# EAGLE board TestHeatBedController (EAGLE 6.1)
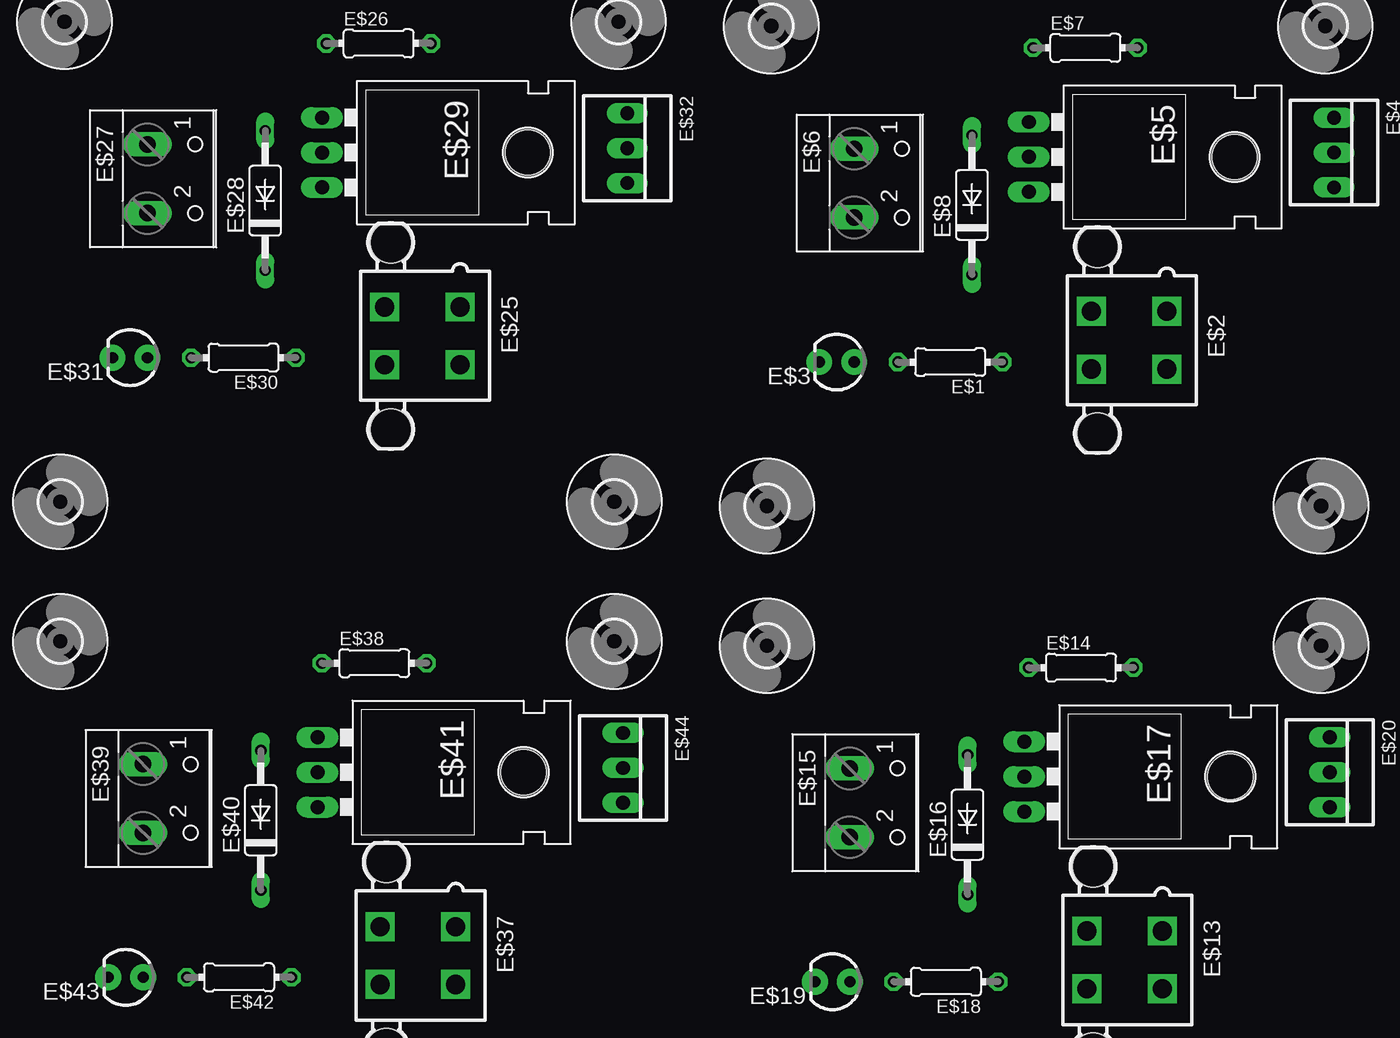
[diagram p0: board, top side]
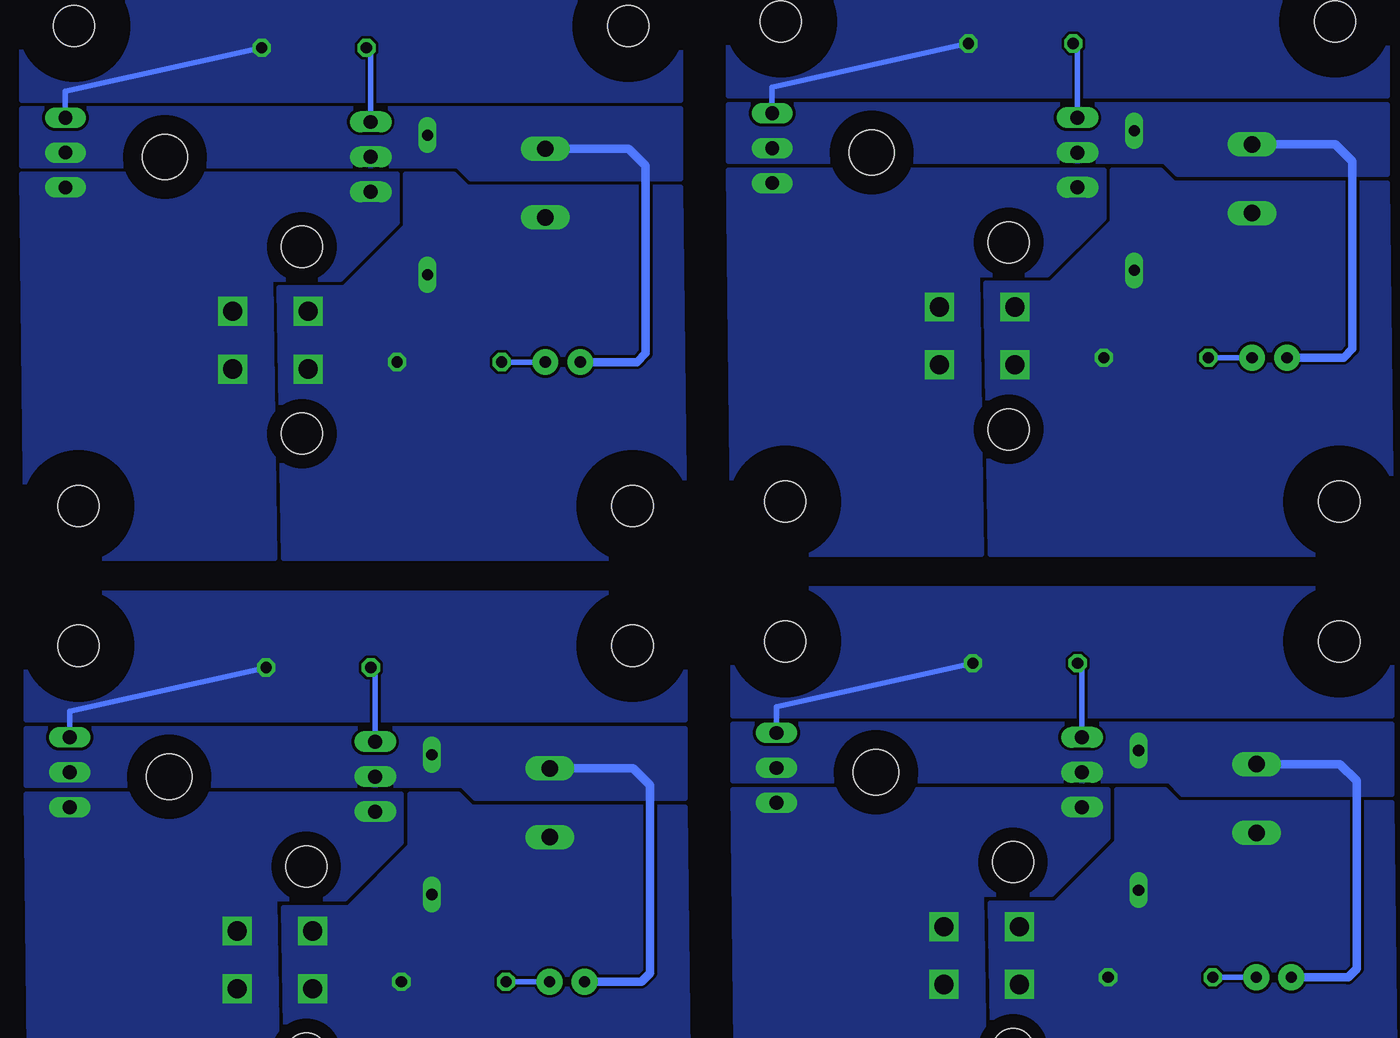
[diagram p1: board, bottom side, seen from below]

No outline drawn. Coordinates in mm, seen from the top.
Copper layers (1*16): Top 0.035mm / dielectric 1.5mm / Bottom 0.035mm
Design rules: minimum track width 10mil, minimum drill 24mil, track to track 8mil, track to pad 8mil, pad to pad 8mil, via to via 8mil, smd to smd 8mil, copper to edge 40mil, drill to drill 8mil, minimum pad ring 10mil, minimum via ring 8mil, stop-mask expansion 4mil, vias tented up to drill 0mil, thermal gap 0mil

## Footprints (pad centres in the part's own frame; a part is rotated, then mirrored left to right if it is on the bottom)
0204/7 = drill 0.813 octagon: 1 -3.81,0; 2 3.81,0
5566-4 = drill 1.4 square: 1 2.1,-2.75; 2 -2.1,-2.75; 3 2.1,2.75; 4 -2.1,2.75 | hole 3: 6.8,2.29; -6.8,2.29
LED3MM = drill 0.813 pad 1.88: A -1.27,0; K 1.27,0
22-23-2031 = drill 1 long: 1 -2.54,0; 2 0,0; 3 2.54,0
TO-220-ALT = drill 1.016 long: GND 0,-3.81; IN -2.54,-3.81; OUT 2.54,-3.81 | hole 3.302: 0,11.176
W237-102 = drill 1.194 long: 1 -2.5,-1.27; 2 2.5,-1.27
C2992 = drill 0.813 long: A 5.08,0; C -5.08,0
3,0 = hole 3: 0,0

## Placement (x,y rotation side)
E$1  [0204/7]  22.54,42.23 180 top
E$2  [5566-4]  35.56,43.81 90 top
E$3  [LED3MM]  14.29,42.23 180 top
E$4  [22-23-2031]  50.48,57.47 270 top
E$5  [TO-220-ALT]  32.07,57.15 270 top
E$6  [W237-102]  16.83,55.24 270 top
E$7  [0204/7]  32.38,65.09 0 top
E$8  [C2992]  24.13,53.66 90 top
E$9  [3,0]  49.53,31.75 0 top
E$10  [3,0]  9.21,31.75 0 top
E$11  [3,0]  49.85,66.67 0 top
E$12  [3,0]  9.53,66.67 0 top
E$13  [5566-4]  35.24,-1.27 90 top
E$14  [0204/7]  32.07,20 0 top
E$15  [W237-102]  16.51,10.16 270 top
E$16  [C2992]  23.81,8.57 90 top
E$17  [TO-220-ALT]  31.75,12.06 270 top
E$18  [0204/7]  22.23,-2.86 180 top
E$19  [LED3MM]  13.97,-2.86 180 top
E$20  [22-23-2031]  50.16,12.38 270 top
E$21  [3,0]  49.21,-13.34 0 top
E$22  [3,0]  8.89,-13.34 0 top
E$23  [3,0]  49.53,21.59 0 top
E$24  [3,0]  9.21,21.59 0 top
E$25  [5566-4]  -15.88,44.13 90 top
E$26  [0204/7]  -19.05,65.41 0 top
E$27  [W237-102]  -34.61,55.56 270 top
E$28  [C2992]  -27.3,53.98 90 top
E$29  [TO-220-ALT]  -19.37,57.47 270 top
E$30  [0204/7]  -28.89,42.55 180 top
E$31  [LED3MM]  -37.15,42.55 180 top
E$32  [22-23-2031]  -0.95,57.78 270 top
E$33  [3,0]  -1.91,32.07 0 top
E$34  [3,0]  -42.23,32.07 0 top
E$35  [3,0]  -1.59,66.99 0 top
E$36  [3,0]  -41.91,66.99 0 top
E$37  [5566-4]  -16.19,-0.95 90 top
E$38  [0204/7]  -19.37,20.32 0 top
E$39  [W237-102]  -34.92,10.48 270 top
E$40  [C2992]  -27.62,8.89 90 top
E$41  [TO-220-ALT]  -19.68,12.38 270 top
E$42  [0204/7]  -29.21,-2.54 180 top
E$43  [LED3MM]  -37.47,-2.54 180 top
E$44  [22-23-2031]  -1.27,12.7 270 top
E$45  [3,0]  -2.22,-13.02 0 top
E$46  [3,0]  -42.55,-13.02 0 top
E$47  [3,0]  -1.91,21.91 0 top
E$48  [3,0]  -42.23,21.91 0 top

## Library data of the parts
E$1 E$7 E$14 E$18 E$26 E$30 E$38 E$42 = resistor
E$2 E$4 E$13 E$20 E$25 E$32 E$37 E$44 = con-molex
E$3 E$19 E$31 E$43 = SparkFun-LED
E$5 E$17 E$29 E$41 = SparkFun-PowerIC
E$6 E$15 E$27 E$39 = con-wago-500
E$8 E$16 E$28 E$40 = diode
E$9-E$12 E$21-E$24 E$33-E$36 E$45-E$48 = holes

## Nets
12V: E$1.1 E$2.3 E$2.4 E$6.2 E$8.C
12V1: E$13.3 E$13.4 E$15.2 E$16.C E$18.1
12V2: E$25.3 E$25.4 E$27.2 E$28.C E$30.1
12V3: E$37.3 E$37.4 E$39.2 E$40.C E$42.1
GATE: E$5.IN E$7.1
GATE1: E$14.1 E$17.IN
GATE2: E$26.1 E$29.IN
GATE3: E$38.1 E$41.IN
GND: E$2.1 E$2.2 E$4.3 E$5.OUT
GND1: E$13.1 E$13.2 E$17.OUT E$20.3
GND2: E$25.1 E$25.2 E$29.OUT E$32.3
GND3: E$37.1 E$37.2 E$41.OUT E$44.3
S$1: E$18.2 E$19.A
S$2: E$1.2 E$3.A
S$3: E$30.2 E$31.A
S$4: E$42.2 E$43.A
SIG: E$4.1 E$7.2
SIG1: E$14.2 E$20.1
SIG2: E$26.2 E$32.1
SIG3: E$38.2 E$44.1
VMOS: E$3.K E$4.2 E$5.GND E$6.1 E$8.A
VMOS1: E$15.1 E$16.A E$17.GND E$19.K E$20.2
VMOS2: E$27.1 E$28.A E$29.GND E$31.K E$32.2
VMOS3: E$39.1 E$40.A E$41.GND E$43.K E$44.2

## Tracks (layer width: path | path; a pad name or v marks a point on that pad's centre or on a via)
12V
  pour Bottom: 25.72,55.88 25.72,52.07 30.16,47.62 34.92,47.62 34.61,27.94 5.4,27.94 5.71,54.93 21.27,54.93 22.23,55.88
12V1
  pour Bottom: 25.4,10.79 25.4,6.99 29.84,2.54 34.61,2.54 34.29,-17.14 5.08,-17.14 5.4,9.84 20.95,9.84 21.91,10.79
12V2
  pour Bottom: -25.72,56.2 -25.72,52.39 -21.27,47.94 -16.51,47.94 -16.83,28.26 -46.04,28.26 -45.72,55.24 -30.16,55.24 -29.21,56.2
12V3
  pour Bottom: -26.04,11.11 -26.04,7.3 -21.59,2.86 -16.83,2.86 -17.14,-16.83 -46.35,-16.83 -46.04,10.16 -30.48,10.16 -29.53,11.11
GATE
  Bottom 0.406: E$7.1 28.26,64.77 E$5.IN
GATE1
  Bottom 0.406: E$14.1 27.94,19.68 E$17.IN
GATE2
  Bottom 0.406: E$26.1 -23.18,65.09 E$29.IN
GATE3
  Bottom 0.406: E$38.1 -23.5,20 E$41.IN
GND
  pour Bottom: 26.35,55.88 53.66,55.88 53.34,27.94 35.24,27.94 35.56,48.26 30.48,48.26 26.35,52.39
GND1
  pour Bottom: 26.04,10.79 53.34,10.79 53.02,-17.14 34.92,-17.14 35.24,3.17 30.16,3.17 26.04,7.3
GND2
  pour Bottom: -25.08,56.2 2.22,56.2 1.91,28.26 -16.19,28.26 -15.88,48.58 -20.95,48.58 -25.08,52.7
GND3
  pour Bottom: -25.4,11.11 1.91,11.11 1.59,-16.83 -16.51,-16.83 -16.19,3.49 -21.27,3.49 -25.4,7.62
S$1
  Bottom 0.406: E$19.A E$18.2
S$2
  Bottom 0.406: E$3.A E$1.2
S$3
  Bottom 0.406: E$31.A E$30.2
S$4
  Bottom 0.406: E$43.A E$42.2
SIG
  Bottom 0.406: E$7.2 50.48,61.91 E$4.1
  pour Bottom: 5.71,61.28 53.66,61.28 53.66,70.48 5.71,70.48
SIG1
  Bottom 0.406: E$14.2 50.16,16.83 E$20.1
  pour Bottom: 5.4,16.19 53.34,16.19 53.34,25.4 5.4,25.4
SIG2
  Bottom 0.406: E$26.2 -0.95,62.23 E$32.1
  pour Bottom: -45.72,61.59 2.22,61.59 2.22,70.8 -45.72,70.8
SIG3
  Bottom 0.406: E$38.2 -1.27,17.14 E$44.1
  pour Bottom: -46.04,16.51 1.91,16.51 1.91,25.72 -46.04,25.72
VMOS
  Bottom 0.406: E$6.1 14.88,57.74
  Bottom 0.61: 14.88,57.74 9.48,57.74 8.26,56.52 8.26,42.86 8.89,42.23 E$3.K
  pour Bottom: 53.66,56.52 21.91,56.52 20.95,55.56 5.71,55.56 5.71,60.64 53.66,60.64
VMOS1
  Bottom 0.406: E$15.1 14.56,12.66
  Bottom 0.61: 14.56,12.66 9.17,12.66 7.94,11.43 7.94,-2.22 8.57,-2.86 E$19.K
  pour Bottom: 53.34,11.43 21.59,11.43 20.64,10.48 5.4,10.48 5.4,15.56 53.34,15.56
VMOS2
  Bottom 0.406: E$27.1 -36.55,58.06
  Bottom 0.61: -36.55,58.06 -41.95,58.06 -43.18,56.83 -43.18,43.18 -42.55,42.55 E$31.K
  pour Bottom: 2.22,56.83 -29.53,56.83 -30.48,55.88 -45.72,55.88 -45.72,60.96 2.22,60.96
VMOS3
  Bottom 0.406: E$39.1 -36.87,12.98
  Bottom 0.61: -36.87,12.98 -42.27,12.98 -43.5,11.75 -43.5,-1.91 -42.86,-2.54 E$43.K
  pour Bottom: 1.91,11.75 -29.84,11.75 -30.8,10.79 -46.04,10.79 -46.04,15.88 1.91,15.88